# EAGLE board promini_modified (EAGLE 9.6.2)
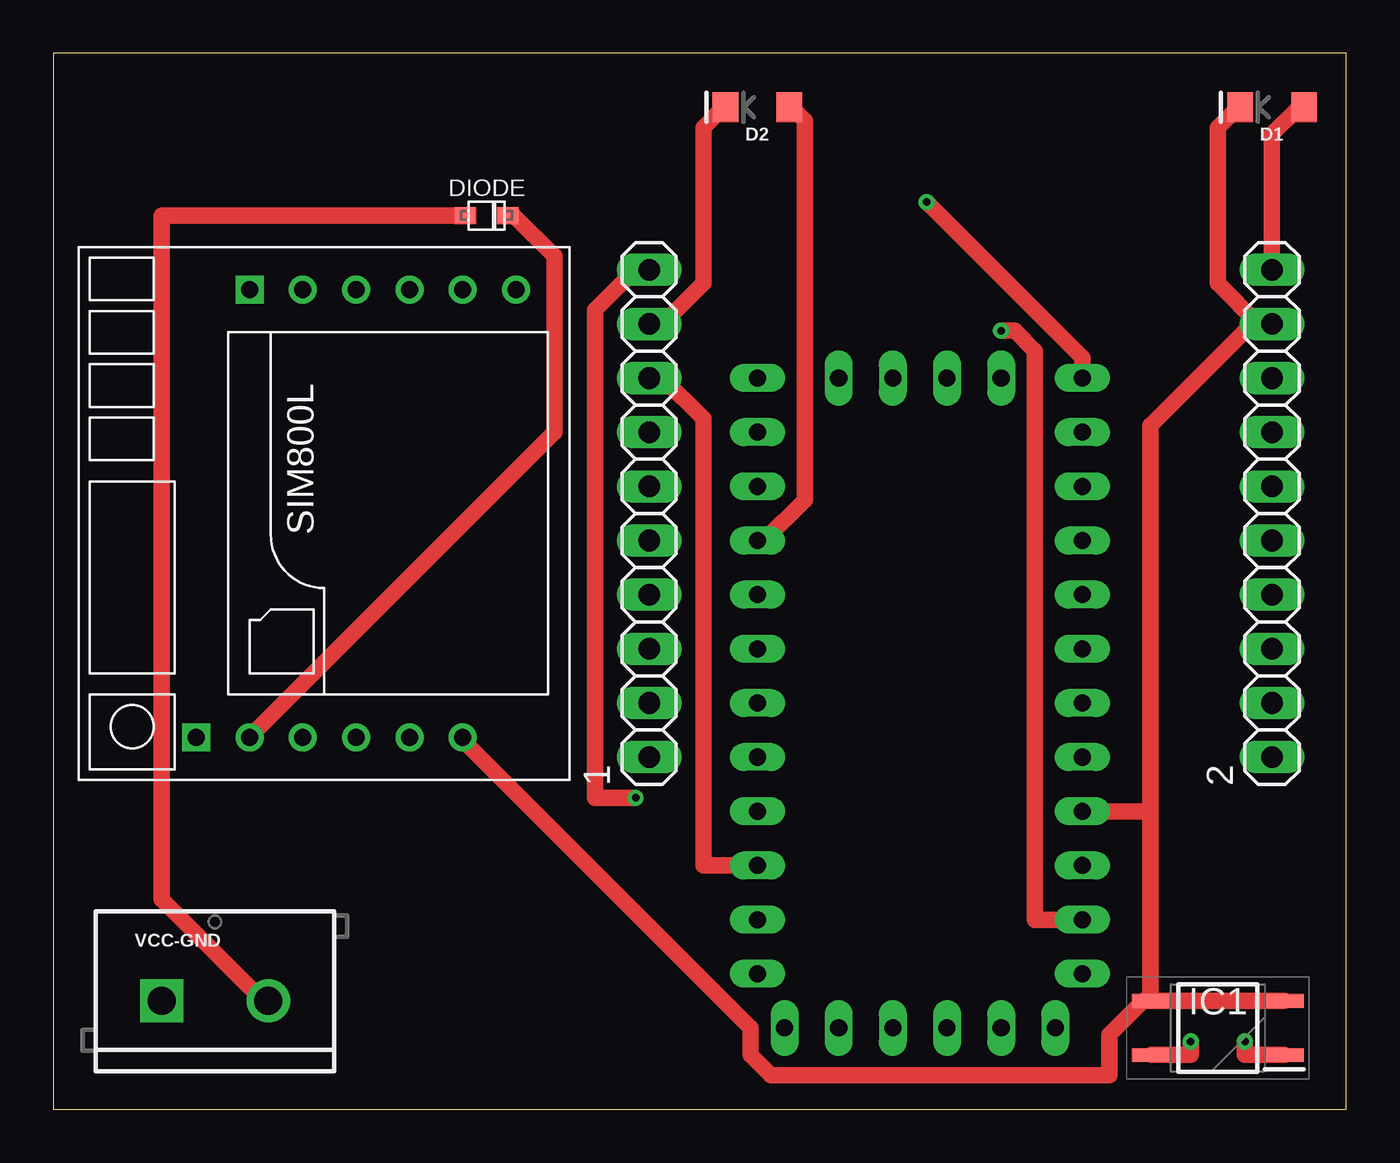
[diagram p0: board, top side]
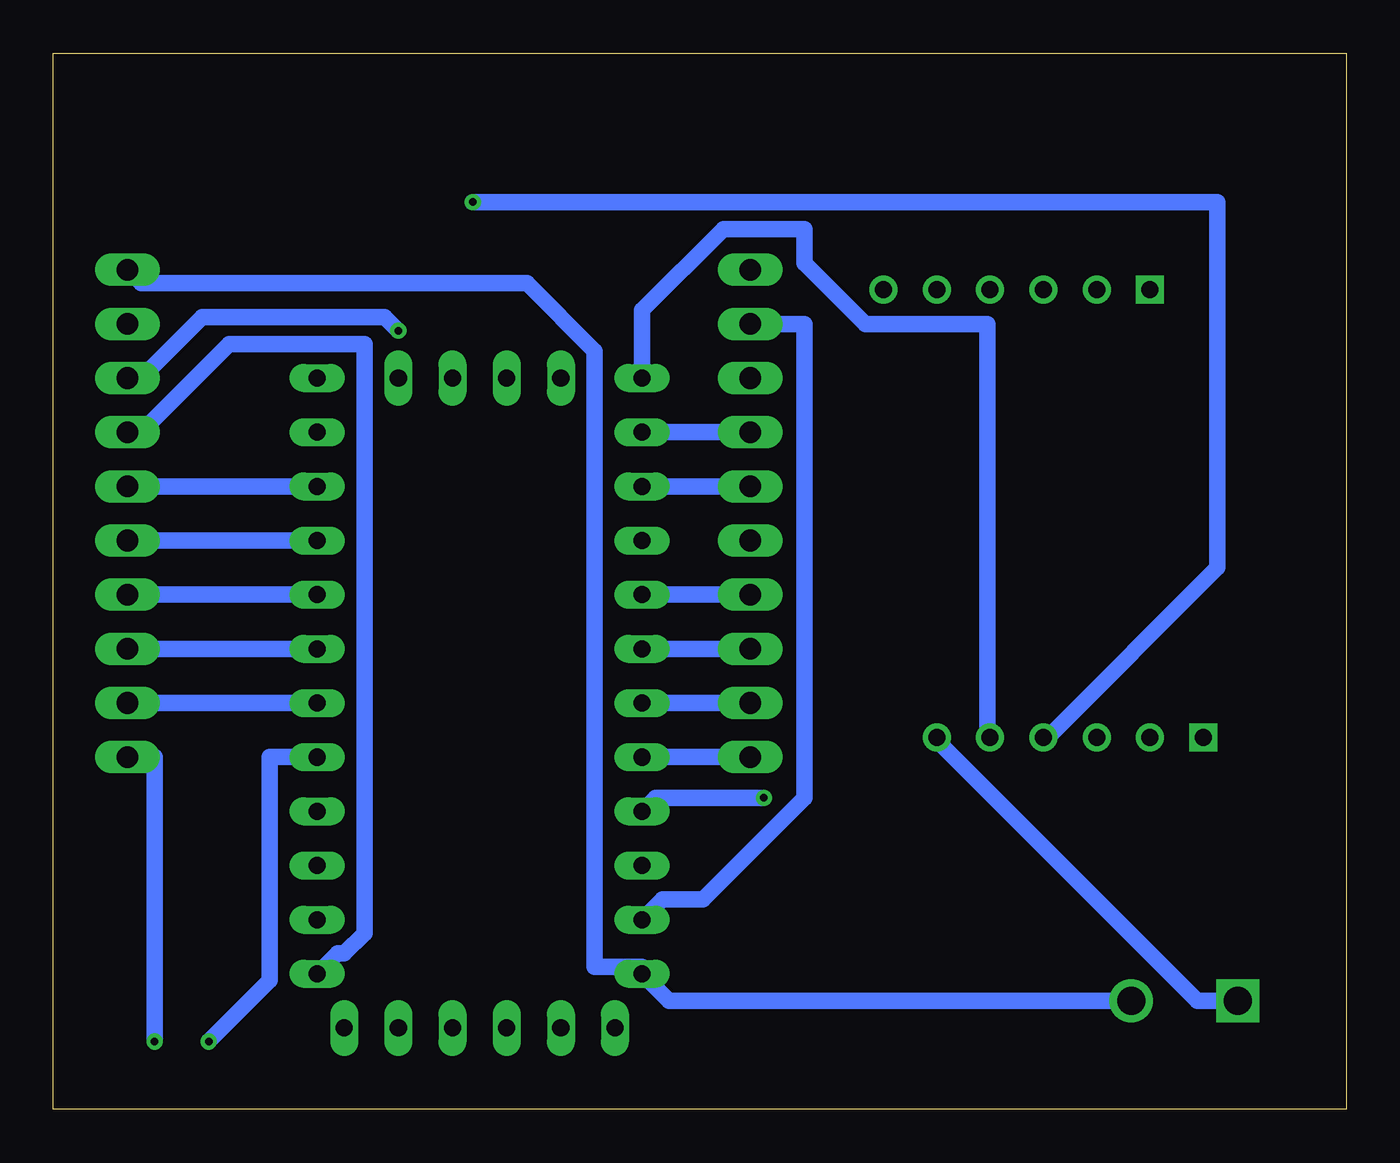
[diagram p1: board, bottom side, seen from below]

Size 60.63 x 49.52 mm. Coordinates in mm from the lower left corner, seen from the top.
Outline: 0,0 60.63,0 60.63,49.52 0,49.52 0,0
Copper layers (1*16): Top 0.035mm / dielectric 1.5mm / Bottom 0.035mm
Design rules "default *": minimum track width 30mil, minimum drill 0.35mm, track to track 20mil, track to pad 20mil, pad to pad 6mil, via to via 6mil, smd to smd 6mil, copper to edge 40mil, drill to drill 6mil, minimum pad ring 10mil, minimum via ring 8mil, stop-mask expansion 4mil, vias tented up to drill 0mil, thermal gap 10mil

## Footprints (pad centres in the part's own frame; a part is rotated, then mirrored left to right if it is on the bottom)
1X10 = drill 1.016 long: 1 -11.43,0; 2 -8.89,0; 3 -6.35,0; 4 -3.81,0; 5 -1.27,0; 6 1.27,0; 7 3.81,0; 8 6.35,0; 9 8.89,0; 10 11.43,0
LED-1206 = smd 1.2 x 1.4: A -1.5,0; C 1.5,0
SOD-323F = smd 1 x 0.8: A -1,0; C 1,0
SOP254P700X200-4N = smd 1.825 x 0.65: 1 -3.112,1.27; 2 -3.112,-1.27; 3 3.112,-1.27; 4 3.112,1.27
PRO-MINI = drill 0.8 long: A0 8.89,8.89; A1 8.89,11.43; A2 8.89,13.97; A3 8.89,16.51; A4 -2.54,-1.27; A5 0,-1.27; A6 2.54,-1.27; A7 5.08,-1.27; D2 -6.35,16.51; D3 -6.35,13.97; D4 -6.35,11.43; D5 -6.35,8.89; D6 -6.35,6.35; D7 -6.35,3.81; D8 -6.35,1.27; D9 -6.35,-1.27; D10 8.89,-1.27; D11 8.89,1.27; D12 8.89,3.81; D13 8.89,6.35; DTR 7.62,29.21; GND 8.89,24.13; GND1 -6.35,19.05; GND2 -5.08,29.21; GND3 -2.54,29.21; RAW 8.89,26.67; RST 8.89,21.59; RST1 -6.35,21.59; RX1 -6.35,24.13; RX1-1 2.54,29.21; TX0 -6.35,26.67; TX0-1 5.08,29.21; VCC 8.89,19.05; VCC1 0,29.21
SIM800LMODULE = drill 0.8: DTR 10.5,1; GND -10.5,-6.5; MIC+ 10.5,-1.5; MIC- 10.5,-4; RST -10.5,1; RX -10.5,-1.5; SPK+ 10.5,-6.5; SPK- 10.5,-9; TX -10.5,-4; VCC -10.5,3.5 | drill 0.8 square: NET -10.5,6; RING 10.5,3.5
SCREWTERMINAL-5MM-2 = drill 1.3 pad 2.032 square: 1 0,0 | drill 1.3 pad 2.032: 2 5,0

## Placement (x,y rotation side)
1  [1X10]  27.94,27.94 90 top
2  [1X10]  57.15,27.94 90 top
D1  RED  [LED-1206]  57.15,46.99 180 top
D2  RED  [LED-1206]  33.02,46.99 180 top
DIODE  [SOD-323F]  20.32,41.91 0 top
IC1  EL357N-B-TA-G  [SOP254P700X200-4N]  54.61,3.81 180 top
PROMINI  PRO-MINI  [PRO-MINI]  41.91,33.02 180 top
U$1  SIM800LMODULE  [SIM800LMODULE]  12.7,27.94 90 top
VCC-GND  [SCREWTERMINAL-5MM-2]  5.08,5.08 0 top

## Library data of the parts
1 2 = pinhead
D1 D2 = SparkFun-LED; PROD_ID: DIO-09912
DIODE = adafruit
IC1 = EL357N-B-TA-G; DESCRIPTION: Optoisolator Transistor Output 3750Vrms 1 Channel 4-SOP (2.54mm); HEIGHT: 2mm; MANUFACTURER_NAME: Everlight Elec; MANUFACTURER_PART_NUMBER: EL357N-B-TA-G
PROMINI = Arduino-clone
U$1 = SIM800LMODULE
VCC-GND = SparkFun-Retired; SF_SKU: PRT-08432

## Nets
D2,D3,D4,D5-IO0,D6-IO2,D7-IO4,D8-IO5,D9-IO9,GND,VIN: 2.6 PROMINI.D7
N$1: 2.10 D1.A DIODE.A PROMINI.RAW VCC-GND.2
N$2: 2.8 PROMINI.RX1
N$3: DIODE.C U$1.VCC
N$4: 1.10 PROMINI.VCC
N$5: IC1.4 PROMINI.D2
N$6: PROMINI.D9 U$1.RX
N$7: D2.A PROMINI.D13
N$8: 2.1 IC1.1
N$9: 2.2 PROMINI.D3
N$10: 2.3 PROMINI.D4
N$11: 2.4 PROMINI.D5
N$12: 2.5 PROMINI.D6
N$13: 1.8 PROMINI.RST
N$14: 2.7 PROMINI.TX0
N$16: 1.1 PROMINI.A3
N$17: 1.2 PROMINI.A2
N$18: 1.3 PROMINI.A1
N$19: 1.4 PROMINI.A0
N$21: 1.6 PROMINI.D12
N$22: 1.7 PROMINI.D11
N$23: PROMINI.D10 U$1.TX
N$24: 1.9 D2.C PROMINI.GND
N$26: 2.9 D1.C IC1.2 IC1.3 PROMINI.GND1 U$1.GND VCC-GND.1

## Tracks (layer width: path | path; a pad name or v marks a point on that pad's centre or on a via)
D2,D3,D4,D5-IO0,D6-IO2,D7-IO4,D8-IO5,D9-IO9,GND,VIN
  Bottom 0.762: 2.6 PROMINI.D7
N$1
  Top 0.762: 2.10 57.15,45.72 58.42,46.99 D1.A | DIODE.A 5.08,41.91 5.08,9.84 9.84,5.08 VCC-GND.2
  Bottom 0.762: VCC-GND.2 31.75,5.08 PROMINI.RAW 33.02,6.67 35.24,6.67 35.24,35.56 38.42,38.73 56.52,38.73 2.10
N$2  (via drill 0.35)
  Top 0.762: PROMINI.RX1 46.04,8.89 46.04,35.56 45.09,36.51 v44.45,36.51
  Bottom 0.762: v44.45,36.51 45.09,37.15 53.66,37.15 56.52,34.29 2.8
N$3
  Top 0.762: DIODE.C 21.59,41.91 23.5,40.01 23.5,31.75 9.21,17.46 U$1.VCC
N$4  (via drill 0.35)
  Top 0.762: v27.3,14.61 25.4,14.61 25.4,37.47 27.3,39.37 1.10
  Bottom 0.762: PROMINI.VCC 32.38,14.61 v27.3,14.61
N$5  (via drill 0.35)
  Top 0.762: IC1.4 53.34,2.54 v53.34,3.17
  Bottom 0.762: v53.34,3.17 50.48,6.03 50.48,16.51 PROMINI.D2
N$6  (via drill 0.35)
  Top 0.762: v40.96,42.55 48.26,35.24 PROMINI.D9
  Bottom 0.762: v40.96,42.55 6.03,42.55 6.03,25.4 13.97,17.46 U$1.RX
N$7
  Top 0.762: PROMINI.D13 33.34,26.67 35.24,28.57 35.24,46.35 34.61,46.99 D2.A
N$8  (via drill 0.35)
  Top 0.762: IC1.1 55.88,2.54 v55.88,3.17
  Bottom 0.762: v55.88,3.17 55.88,16.51 2.1
N$9
  Bottom 0.762: 2.2 PROMINI.D3
N$10
  Bottom 0.762: 2.3 PROMINI.D4
N$11
  Bottom 0.762: 2.4 PROMINI.D5
N$12
  Bottom 0.762: 2.5 PROMINI.D6
N$13
  Top 0.762: PROMINI.RST 30.48,11.43 30.48,32.38 28.57,34.29 1.8
N$14
  Bottom 0.762: PROMINI.TX0 47.31,7.3 46.99,7.3 46.04,8.26 46.04,35.88 52.39,35.88 56.52,31.75 2.7
N$16
  Bottom 0.762: 1.1 PROMINI.A3
N$17
  Bottom 0.762: 1.2 PROMINI.A2
N$18
  Bottom 0.762: 1.3 PROMINI.A1
N$19
  Bottom 0.762: 1.4 PROMINI.A0
N$21
  Bottom 0.762: 1.6 PROMINI.D12
N$22
  Bottom 0.762: 1.7 PROMINI.D11
N$23
  Bottom 0.762: PROMINI.D10 33.02,37.47 29.21,41.27 25.4,41.27 25.4,39.69 22.54,36.83 16.83,36.83 16.83,17.46 U$1.TX
N$24
  Top 0.762: 1.9 28.57,36.83 30.48,38.73 30.48,46.04 31.43,46.99 D2.C
  Bottom 0.762: PROMINI.GND 32.07,9.84 30.16,9.84 25.4,14.61 25.4,36.83 1.9
N$26
  Top 0.762: D1.C 55.56,46.99 54.61,46.04 54.61,38.73 56.52,36.83 2.9 56.2,36.83 51.44,32.07 51.44,13.97 | IC1.2 IC1.3 | 51.44,13.97 PROMINI.GND1 | 51.44,13.97 51.44,5.4 IC1.3 | U$1.GND 19.37,17.14 32.7,3.81 32.7,2.54 33.66,1.59 49.53,1.59 49.53,3.49 51.12,5.08 IC1.3
  Bottom 0.762: VCC-GND.1 6.99,5.08 19.05,17.14 U$1.GND